# Altium PCB 606-100870-r01.pcbdoc
Units mm, origin at the board's own origin, x right, y up, seen from the top; angles counter-clockwise.
Board outline 62.5 x 28 mm, 2 copper layers (Top Layer, Bottom Layer), stack 1.471 mm thick; 13 components, 5 nets, 34 pads, 13 vias.
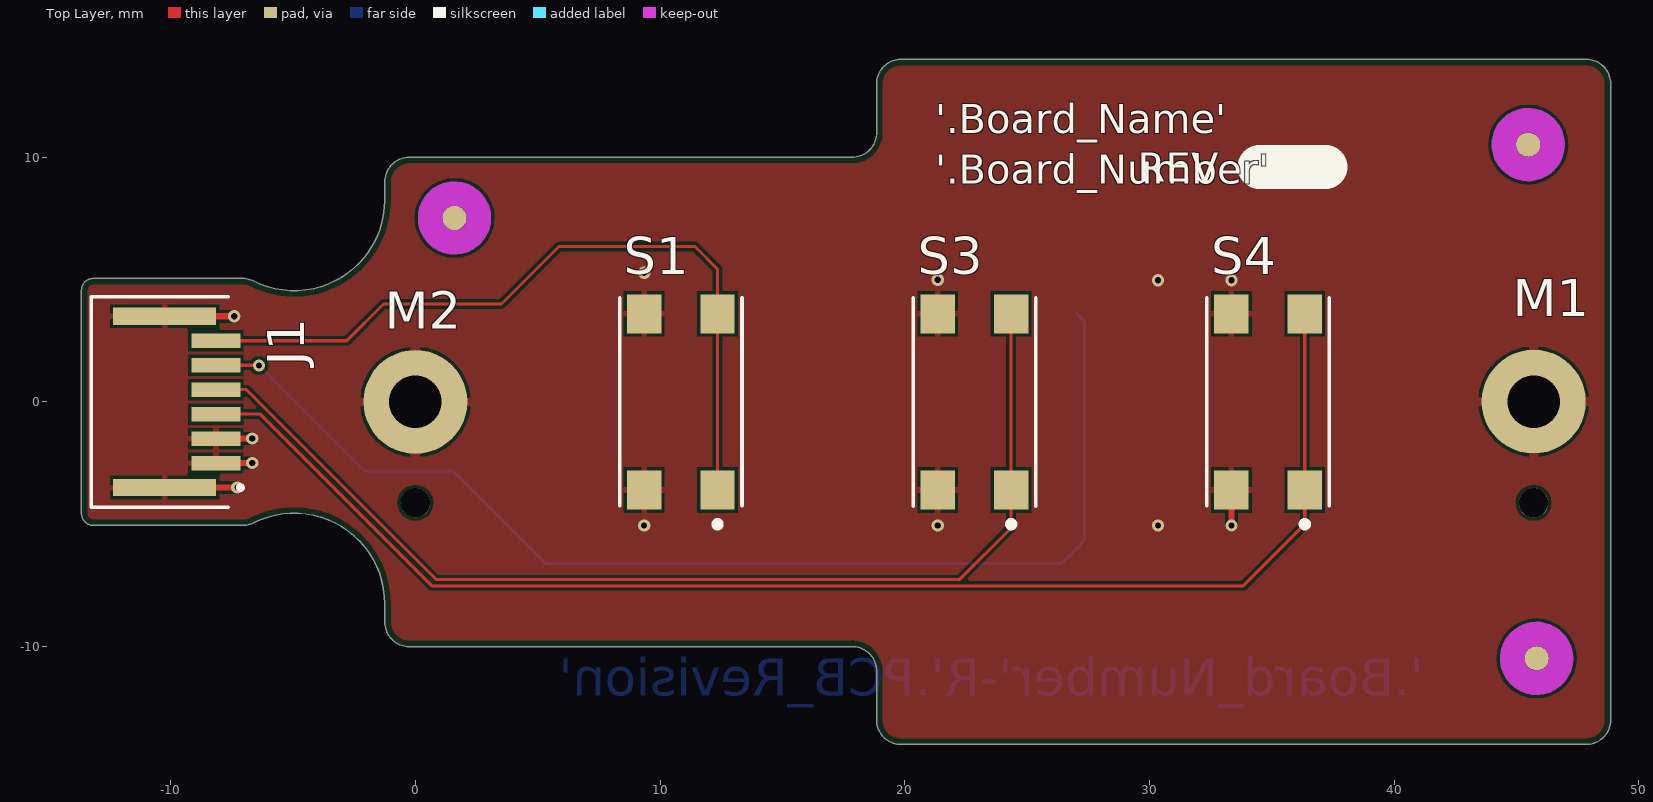
[diagram p0: Top Layer view]
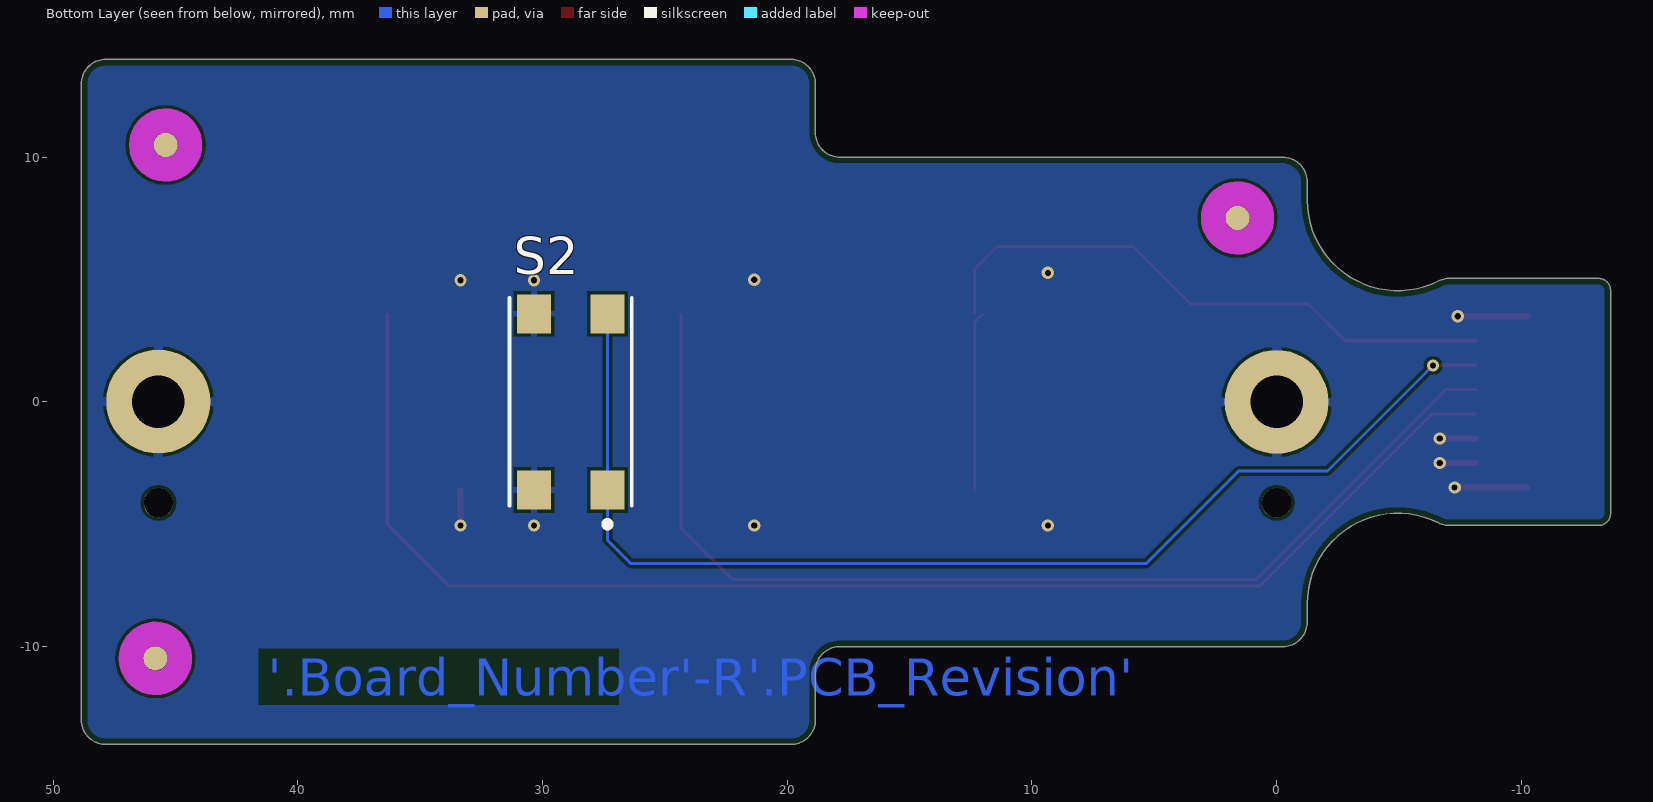
[diagram p1: Bottom Layer view, seen from below]

## Layer stack, top to bottom
Top Solder: solder mask 0.0102, Solder Resist, Dk 3.5
Top Layer: signal copper 0.0356
Dielectric 1: core 1.4, FR-4, Dk 4.2
Bottom Layer: signal copper 0.0356
Bottom Solder: solder mask 0.0102, Solder Resist, Dk 3.5

## Board outline
-13.15,-5.05 -7.06,-5.05 ccw(c-7.06,-4.05) -6.611,-4.944 cw(c-4.95,-8.25) -1.25,-8.25 -1.25,-9 ccw(c-0.25,-9) -0.25,-10 17.85,-10 cw(c17.85,-11) 18.85,-11 18.85,-13 ccw(c19.85,-13) 19.85,-14 47.85,-14 ccw(c47.85,-13) 48.85,-13 48.85,13 ccw(c47.85,13) 47.85,14 19.85,14 ccw(c19.85,13) 18.85,13 18.85,11 cw(c17.85,11) 17.85,10 -0.25,10 ccw(c-0.25,9) -1.25,9 -1.25,8.25 cw(c-4.95,8.25) -6.611,4.944 ccw(c-7.06,4.05) -7.06,5.05 -13.15,5.05 ccw(c-13.15,4.55) -13.65,4.55 -13.65,-4.55 ccw(c-13.15,-4.55)

## Design rules (kind name [scope] priority, off if disabled: settings)
BoardOutlineClearance [All] p1: gap=0.25 except(0: Text-OutlineEdge)
Clearance [All] p1: gap=0.125
ComponentClearance [All] p1: gap=0.18 collisioncheckmode=3 verticalgap=0.18 showdistances=FALSE
HoleSize [All] p1: absolutevalues=TRUE maxlimit=2.7 minlimit=0.025 maxpercent=80.000 minpercent=20.000
MinimumSolderMaskSliver MinimumSolderMaskSliver_1 [isvia vs IsPad] p1: minsoldermaskwidth=0
MinimumSolderMaskSliver [All] p2: minsoldermaskwidth=0.05
PlaneClearance [All] p1: clearance=0.2
PlaneConnect [All] p1: planeconnectstyle=Direct reliefexpansion=0.508 reliefentries=4 reliefconductorwidth=0.254 reliefairgap=0.254
PolygonConnect MTG [InPadClass('Thick_Thermal')] p1: connectstyle=Relief reliefconductorwidth=0.4 reliefentries=4 polygonreliefangle="90 Angle" airgapwidth=0.125
PolygonConnect POLY_VIA [IsVia vs IsPolygon] p2: connectstyle=Direct reliefconductorwidth=0.254 reliefentries=4 polygonreliefangle="90 Angle" airgapwidth=0.254
PolygonConnect PolygonConnect_1 [All] p3: connectstyle=Relief reliefconductorwidth=0.25 reliefentries=4 polygonreliefangle="90 Angle" airgapwidth=0.125
RoomDefinition Handle_Button [InComponentClass('Handle_Button')] p1: confinementstyle=ConfineIn formatcopy=TRUE lockcomponents=FALSE outline -11.985,-14.067 71.531,-14.067 71.531,7.929 -11.985,7.929
RoutingVias [All] p1: holewidth=0.25 width=0.5 viastyle="Through Hole" minholewidth=0.25 minwidth=0.5 maxholewidth=0.25 maxwidth=0.5
SilkToSilkClearance [All] p1 off: silktosilkclearance=0.05
SilkToSolderMaskClearance [IsPad] p1: minsilkscreentomaskgap=0.125 clearancetoexposedcopper=TRUE
SolderMaskExpansion [All] p1: expansion=0.05
Width PWR_GND [InNetClass('PWR_GND')] p1: maxlimit=0.25 minlimit=0.25 preferedwidth=0.25
Width CRITICAL [InNetClass('MOTOR_DRIVERS')] p2: maxlimit=0.4 minlimit=0.3 preferedwidth=0.4
Width [All] p3: maxlimit=0.5 minlimit=0.125 preferedwidth=0.125
23 further rules are at their usual default settings.

## Classes and differential pairs
pad class Thick_Thermal: M1-1 M2-1
component class Handle_Button: J1 M1 M2 S1 S2 S3 S4
net class PWR_GND: GND

## Components (designator, comment, footprint, x,y, rotation, side; value= is the part's Value field where it differs from the comment)
J1 "HFW6R-2STE1LF" CON_FCI_HFW6R -9.15,0 r90 top
M1 "MTGC425H215P" MTGC425H215P 45.7,0 r0 top
M2 "MTGC425H215P" MTGC425H215P -0.007,-0.011 r0 top
S1 "TL3305AF260QG" SW_TL3305_G 10.85,0 r90 top
S2 "TL3305AF260QG" SW_TL3305_G 28.85,0 r90 bottom
S3 "TL3305AF260QG" SW_TL3305_G 22.85,0 r90 top
S4 "TL3305AF260QG" SW_TL3305_G 34.85,0 r90 top
? "Comment" Fiducial_c100opening300 1.599,7.517 r180 bottom
? "Comment" Fiducial_c100opening300 45.825,-10.483 r180 bottom
? "Comment" Fiducial_c100opening300 45.407,10.5 r180 bottom
? "Comment" Fiducial_c100opening300 45.482,10.517 r0 top
? "Comment" Fiducial_c100opening300 45.825,-10.483 r0 top
? "Comment" Fiducial_c100opening300 1.599,7.517 r0 top

## Footprints (in the part's own frame and the unit in brackets; to place one, negate y for a bottom-side part, rotate by r counter-clockwise, add the part's x,y. Pads: shape width x height; smd on the part's side, far side on the other; paste and mask are expansions set on the pad)
CON_FCI_HFW6R [mm] "CON_JST_S3B-ZR-SM4A"
  rect 0.6x2 smd mask+0.05: 1(2.5,-1) 2(1.5,-1) 3(0.5,-1) 4(-0.5,-1) 5(-1.5,-1) 6(-2.5,-1)
  rect 0.7x4.2 smd mask+0.05: 7(3.5,1.1) 8(-3.5,1.1)
  silkscreen extent -4.3,-2.09 4.3,4.1, body extent -4.3,-1.6 4.3,4.1, height 2
Fiducial_c100opening300 [mm]
  round 1 smd paste-10 mask+1: 0(0,0)
  Top Layer keep-out circle w1: c0,0 r1
MTGC425H215P [mm] "MTGC425H215P"
  round 4.25 hole 2.15: 1(0.007,0.011)
SW_TL3305_G [mm] "SWITCH TACTILE SPST-NO 50MA 12V"
  rect 1.6x1.4 smd mask+0.05: 1(-3.6,-1.5) 2(3.6,-1.5) 3(-3.6,1.5) 4(3.6,1.5)
  silkscreen extent -5.12,-2.5 4.25,2.5, body extent -2.25,-2.25 2.25,2.25, height 3.8

## Part data
J1: "CONN FFC FPC TOP 6POS 1.00MM R/A"
M1 M2: "MTG, 4.25mm PAD, 2.15mm Plated Hole"
S1 S2 S3 S4: "SWITCH TACTILE SPST-NO 50MA 12V"

## Free pads (board coordinates)
  round 1.2 hole 1.2 unplated: 0(0,-4.125) 0(45.7,-4.125)

## Via types
v1: diameter 0.5, hole 0.25, Top Layer to Bottom Layer, tented both sides, 13 vias

## Nets (pads, with @x,y where several pads share a name; then routed paths per layer and width w, separated by ;. In a path a pad name is that pad's centre, name@x,y a point inside that pad or via, vN(x,y) a via of type N, cw(c..) or ccw(c..) an arc to the next point about the centre after c; other vN are vias at no path point)
BTN_MENU: J1.1 S1.1 S1.2 | length 31.6
  Top Layer w0.125: J1.1@-8.15,2.5 -2.8,2.5 -1.3,4 3.523,4 5.873,6.35 11.425,6.35 12.35,5.425 S1.2@12.35,3.6 ; S1.2@12,3.6 12.35,3.25 S1.1@12.35,-3.6
BTN_SYS: J1.4 S4.1 S4.2 | length 57
  Top Layer w0.125: J1.4@-8.15,-0.5 -6.341,-0.5 0.675,-7.516 33.834,-7.516 36.35,-5 S4.1@36.35,-3.6 S4.2@36.35,3.6
BTN_TRACK: J1.3 S3.1 S3.2 | length 45.3
  Top Layer w0.125: J1.3@-8.15,0.5 -6.9,0.5 0.866,-7.266 22.234,-7.266 24.35,-5.15 S3.1@24.35,-3.6 S3.2@24.35,3.6
BTN_TRIG: J1.2 S2.1 S2.2 | length 48.6
  Top Layer w0.125: J1.2@-8.15,1.5 -6.4,1.5 v1(-6.388,1.488)
  Bottom Layer w0.125: v1(-6.388,1.488) -2.077,-2.823 1.553,-2.823 5.33,-6.6 26.4,-6.6 27.35,-5.65 S2.1@27.35,-3.6 27.35,3.275 S2.2@27.025,3.6
GND: J1.5 J1.6 J1.7 J1.8 M1.1 M2.1 S1.3 S1.4 S2.3 S2.4 S3.3 S3.4 S4.3 S4.4 | length 10.2
  Top Layer w0.25: J1.8@-10.25,-3.5 v1(-7.275,-3.5) ; J1.7@-10.25,3.5 v1(-7.4,3.5) ; J1.6@-8.142,-2.5 v1(-6.667,-2.5) ; J1.5@-8.142,-1.5 v1(-6.667,-1.5) ; v1(33.35,-5.05) S4.3@33.35,-3.6
  other v1: 9.35,-5.05 21.35,-5.05 30.35,-5.05 21.35,4.993 30.35,4.975 33.35,4.975 9.35,5.275
pads on no net: ?.0

## Polygon pours and split planes (outlines as drawn)
no net on FAB_DWG (solid): 1029 vertices, not listed, extent 270.174,-80.37 411.22,-66.796
no net on FAB_DWG (solid): 89 vertices, not listed, extent 310.393,-70.562 316.813,-66.798
no net on FAB_DWG (solid): 74 vertices, not listed, extent 322.063,-73.533 329.456,-66.798
no net on FAB_DWG (solid): 83 vertices, not listed, extent 335.845,-72.299 340.75,-67.711
no net on FAB_DWG (solid): 82 vertices, not listed, extent 347.458,-70.943 353.803,-67.715
no net on FAB_DWG (solid): -243.368,9 ccw(c-243.868,9) -243.868,9.5 ccw(c-243.868,9) -244.368,9 ccw(c-243.868,9) -243.868,8.5 ccw(c-243.868,9) -243.368,9
no net on FAB_DWG (solid): -243.368,-15 ccw(c-243.868,-15) -243.868,-14.5 ccw(c-243.868,-15) -244.368,-15 ccw(c-243.868,-15) -243.868,-15.5 ccw(c-243.868,-15) -243.368,-15
no net on FAB_DWG (solid): -247.368,9 ccw(c-247.868,9) -247.868,9.5 ccw(c-247.868,9) -248.368,9 ccw(c-247.868,9) -247.868,8.5 ccw(c-247.868,9) -247.368,9
no net on FAB_DWG (solid): -249.368,9 ccw(c-249.868,9) -249.868,9.5 ccw(c-249.868,9) -250.368,9 ccw(c-249.868,9) -249.868,8.5 ccw(c-249.868,9) -249.368,9
no net on FAB_DWG (solid): -251.368,9 ccw(c-251.868,9) -251.868,9.5 ccw(c-251.868,9) -252.368,9 ccw(c-251.868,9) -251.868,8.5 ccw(c-251.868,9) -251.368,9
no net on FAB_DWG (solid): -245.368,9 ccw(c-245.868,9) -245.868,9.5 ccw(c-245.868,9) -246.368,9 ccw(c-245.868,9) -245.868,8.5 ccw(c-245.868,9) -245.368,9
no net on FAB_DWG (solid): -247.368,-15 ccw(c-247.868,-15) -247.868,-14.5 ccw(c-247.868,-15) -248.368,-15 ccw(c-247.868,-15) -247.868,-15.5 ccw(c-247.868,-15) -247.368,-15
no net on FAB_DWG (solid): -249.368,-15 ccw(c-249.868,-15) -249.868,-14.5 ccw(c-249.868,-15) -250.368,-15 ccw(c-249.868,-15) -249.868,-15.5 ccw(c-249.868,-15) -249.368,-15
no net on FAB_DWG (solid): -251.368,-15 ccw(c-251.868,-15) -251.868,-14.5 ccw(c-251.868,-15) -252.368,-15 ccw(c-251.868,-15) -251.868,-15.5 ccw(c-251.868,-15) -251.368,-15
no net on FAB_DWG (solid): -245.368,-15 ccw(c-245.868,-15) -245.868,-14.5 ccw(c-245.868,-15) -246.368,-15 ccw(c-245.868,-15) -245.868,-15.5 ccw(c-245.868,-15) -245.368,-15
no net on FAB_DWG (solid): -255.368,9 ccw(c-255.868,9) -255.868,9.5 ccw(c-255.868,9) -256.368,9 ccw(c-255.868,9) -255.868,8.5 ccw(c-255.868,9) -255.368,9
no net on FAB_DWG (solid): -253.368,9 ccw(c-253.868,9) -253.868,9.5 ccw(c-253.868,9) -254.368,9 ccw(c-253.868,9) -253.868,8.5 ccw(c-253.868,9) -253.368,9
no net on FAB_DWG (solid): -259.368,9 ccw(c-259.868,9) -259.868,9.5 ccw(c-259.868,9) -260.368,9 ccw(c-259.868,9) -259.868,8.5 ccw(c-259.868,9) -259.368,9
no net on FAB_DWG (solid): -257.368,9 ccw(c-257.868,9) -257.868,9.5 ccw(c-257.868,9) -258.368,9 ccw(c-257.868,9) -257.868,8.5 ccw(c-257.868,9) -257.368,9
no net on FAB_DWG (solid): -255.368,-15 ccw(c-255.868,-15) -255.868,-14.5 ccw(c-255.868,-15) -256.368,-15 ccw(c-255.868,-15) -255.868,-15.5 ccw(c-255.868,-15) -255.368,-15
no net on FAB_DWG (solid): -253.368,-15 ccw(c-253.868,-15) -253.868,-14.5 ccw(c-253.868,-15) -254.368,-15 ccw(c-253.868,-15) -253.868,-15.5 ccw(c-253.868,-15) -253.368,-15
no net on FAB_DWG (solid): -257.368,-15 ccw(c-257.868,-15) -257.868,-14.5 ccw(c-257.868,-15) -258.368,-15 ccw(c-257.868,-15) -257.868,-15.5 ccw(c-257.868,-15) -257.368,-15
no net on FAB_DWG (solid): -259.368,-15 ccw(c-259.868,-15) -259.868,-14.5 ccw(c-259.868,-15) -260.368,-15 ccw(c-259.868,-15) -259.868,-15.5 ccw(c-259.868,-15) -259.368,-15
no net on FAB_DWG (solid): -261.368,9 ccw(c-261.868,9) -261.868,9.5 ccw(c-261.868,9) -262.368,9 ccw(c-261.868,9) -261.868,8.5 ccw(c-261.868,9) -261.368,9
no net on FAB_DWG (solid): -263.368,9 ccw(c-263.868,9) -263.868,9.5 ccw(c-263.868,9) -264.368,9 ccw(c-263.868,9) -263.868,8.5 ccw(c-263.868,9) -263.368,9
no net on FAB_DWG (solid): -267.368,9 ccw(c-267.868,9) -267.868,9.5 ccw(c-267.868,9) -268.368,9 ccw(c-267.868,9) -267.868,8.5 ccw(c-267.868,9) -267.368,9
no net on FAB_DWG (solid): -265.368,9 ccw(c-265.868,9) -265.868,9.5 ccw(c-265.868,9) -266.368,9 ccw(c-265.868,9) -265.868,8.5 ccw(c-265.868,9) -265.368,9
no net on FAB_DWG (solid): -261.368,-15 ccw(c-261.868,-15) -261.868,-14.5 ccw(c-261.868,-15) -262.368,-15 ccw(c-261.868,-15) -261.868,-15.5 ccw(c-261.868,-15) -261.368,-15
no net on FAB_DWG (solid): -263.368,-15 ccw(c-263.868,-15) -263.868,-14.5 ccw(c-263.868,-15) -264.368,-15 ccw(c-263.868,-15) -263.868,-15.5 ccw(c-263.868,-15) -263.368,-15
no net on FAB_DWG (solid): -265.368,-15 ccw(c-265.868,-15) -265.868,-14.5 ccw(c-265.868,-15) -266.368,-15 ccw(c-265.868,-15) -265.868,-15.5 ccw(c-265.868,-15) -265.368,-15
no net on FAB_DWG (solid): -267.368,-15 ccw(c-267.868,-15) -267.868,-14.5 ccw(c-267.868,-15) -268.368,-15 ccw(c-267.868,-15) -267.868,-15.5 ccw(c-267.868,-15) -267.368,-15
no net on FAB_DWG (solid): -269.368,9 ccw(c-269.868,9) -269.868,9.5 ccw(c-269.868,9) -270.368,9 ccw(c-269.868,9) -269.868,8.5 ccw(c-269.868,9) -269.368,9
no net on FAB_DWG (solid): -271.368,9 ccw(c-271.868,9) -271.868,9.5 ccw(c-271.868,9) -272.368,9 ccw(c-271.868,9) -271.868,8.5 ccw(c-271.868,9) -271.368,9
no net on FAB_DWG (solid): -273.968,0.5 -273.468,2 -242.268,2 -241.768,0.5 -273.968,0.5
no net on FAB_DWG (solid): -241.768,-6.5 -242.268,-8 -273.468,-8 -273.968,-6.5 -241.768,-6.5
no net on FAB_DWG (solid): -269.368,-15 ccw(c-269.868,-15) -269.868,-14.5 ccw(c-269.868,-15) -270.368,-15 ccw(c-269.868,-15) -269.868,-15.5 ccw(c-269.868,-15) -269.368,-15
no net on FAB_DWG (solid): -271.368,-15 ccw(c-271.868,-15) -271.868,-14.5 ccw(c-271.868,-15) -272.368,-15 ccw(c-271.868,-15) -271.868,-15.5 ccw(c-271.868,-15) -271.368,-15
no net on FAB_DWG (solid): -328.868,8.5 -329.868,12.5 -328.868,12 -327.868,12.5 -328.868,8.5
no net on FAB_DWG (solid): -328.868,-15.5 -327.868,-19.5 -328.868,-19 -329.868,-19.5 -328.868,-15.5
no net on ASY_DWG (solid): 1029 vertices, not listed, extent 270.174,-80.37 411.22,-66.796
no net on ASY_DWG (solid): 89 vertices, not listed, extent 310.393,-70.562 316.813,-66.798
no net on ASY_DWG (solid): 74 vertices, not listed, extent 322.063,-73.533 329.456,-66.798
no net on ASY_DWG (solid): 83 vertices, not listed, extent 335.845,-72.299 340.75,-67.711
no net on ASY_DWG (solid): 82 vertices, not listed, extent 347.458,-70.943 353.803,-67.715
no net on ASY_DWG_R (solid): 1029 vertices, not listed, extent -359.78,-80.37 -218.734,-66.796
no net on ASY_DWG_R (solid): 89 vertices, not listed, extent -265.373,-70.562 -258.954,-66.798
no net on ASY_DWG_R (solid): 74 vertices, not listed, extent -278.016,-73.533 -270.624,-66.798
no net on ASY_DWG_R (solid): 83 vertices, not listed, extent -289.311,-72.299 -284.406,-67.711
no net on ASY_DWG_R (solid): 82 vertices, not listed, extent -302.363,-70.943 -296.018,-67.715
no net on TITLEBLOCK (solid): 331 vertices, not listed, extent -37.805,-53.37 20.9,-46.75
no net on TITLEBLOCK (solid): -15.868,-46.97 -13.33,-49.288 -13.33,-46.97 -15.868,-46.97
no net on TITLEBLOCK (solid): -21.055,-46.97 -19.932,-48.179 -18.853,-46.97 -21.055,-46.97
no net on TITLEBLOCK (solid): -10.57,-48.87 -9.58,-47.07 -8.68,-48.87 -10.57,-48.87
no net on TITLEBLOCK (solid): 26 vertices, not listed, extent -5.73,-48.27 -3.03,-46.97
GND on Bottom Layer "GND_L02_P000" (solid, pour order 0): 19 vertices, not listed, extent -15,-19 51,18
GND on Top Layer "GND_L01_P002" (solid, pour order 2): -15.7,13.8 -15.7,-12.275 15.39,-12.275 18.665,-15.55 18.74,-15.625 50.55,-15.625 50.55,16.35 50.725,16.525 16.75,16.525 14.375,16.525 11.65,13.8

## Other copper
Top Layer:
  text ".Layer_Name" at -9.203,-72 h3.5
Bottom Layer:
  text "'.Board_Number'-R'.PCB_Revision'" at 41.229,-12 h1.52
  text ".Layer_Name" at -13.694,-72 h3.5

## Silkscreen, mask and mechanical layers (free items; w line width, h text height)
Top Overlay:
  lines w1.8: 34.5,9.61 37.2,9.61
  text "'.Board_Name'" at 21.252,10.987 h1.2
  text "REV" at 29.525,9 h1.2
  text "'.Board_Number'" at 21.252,8.916 h1.2
  text ".Layer_Name" at -10.044,-71.917 h3.5
Bottom Overlay:
  text ".Layer_Name" at -14.969,-71.842 h3.5
Top Paste:
  text ".Layer_Name" at -9.919,-72.617 h3.5
Bottom Paste:
  text ".Layer_Name" at -13.844,-72.583 h3.5
Top Solder:
  text ".Layer_Name" at -10.028,-72 h3.5
Bottom Solder:
  text ".Layer_Name" at -13.469,-72.117 h3.5
Drill Guide:
  text ".Layer_Name" at 12.431,-27.167 h3.81
Outline:
  lines w0.013: -13.65,-4.55 ccw(c-13.15,-4.55) -13.15,-5.05 ; -13.65,-4.55 ccw(c-13.15,-4.55) -13.15,-5.05 ; -13.65,-4.55 -13.65,-4.3 -13.65,4.3 -13.65,4.55 ; -13.65,-4.55 -13.65,4.55 ; -13.65,4.55 cw(c-13.15,4.55) -13.15,5.05 ; -13.65,4.55 cw(c-13.15,4.55) -13.15,5.05 ; -13.15,-5.05 -7.06,-5.05 ; -13.15,-5.05 -7.06,-5.05 ; -13.15,5.05 -7.06,5.05 ; -13.15,5.05 -7.06,5.05 ; -7.06,-5.05 ccw(c-7.06,-4.05) -6.611,-4.944 ; -7.06,-5.05 ccw(c-7.06,-4.05) -6.611,-4.944 ; -7.06,5.05 cw(c-7.06,4.05) -6.611,4.944 ; -7.06,5.05 cw(c-7.06,4.05) -6.611,4.944 ; -6.611,-4.944 cw(c-4.95,-8.25) -1.25,-8.25 ; -6.611,-4.944 cw(c-4.95,-8.25) -1.25,-8.25 ; -6.611,4.944 ccw(c-4.95,8.25) -1.25,8.25 ; -6.611,4.944 ccw(c-4.95,8.25) -1.25,8.25 ; -1.25,-9 ccw(c-0.25,-9) -0.25,-10 ; -1.25,-9 ccw(c-0.25,-9) -0.25,-10 ; -1.25,-9 -1.25,-8.25 ; -1.25,-9 -1.25,-8.25 ; -1.25,8.25 -1.25,9 ; -1.25,8.25 -1.25,9 ; -1.25,9 cw(c-0.25,9) -0.25,10 ; -1.25,9 cw(c-0.25,9) -0.25,10 ; -0.25,-10 17.85,-10 ; -0.25,-10 17.85,-10 ; -0.25,10 17.85,10 ; -0.25,10 17.85,10 ; 17.85,-10 cw(c17.85,-11) 18.85,-11 ; 17.85,-10 cw(c17.85,-11) 18.85,-11 ; 17.85,10 ccw(c17.85,11) 18.85,11 ; 17.85,10 ccw(c17.85,11) 18.85,11 ; 18.85,-13 ccw(c19.85,-13) 19.85,-14 ; 18.85,-13 ccw(c19.85,-13) 19.85,-14 ; 18.85,-13 18.85,-11 ; 18.85,-13 18.85,-11 ; 18.85,11 18.85,13 ; 18.85,11 18.85,13 ; 18.85,13 cw(c19.85,13) 19.85,14 ; 18.85,13 cw(c19.85,13) 19.85,14 ; 19.85,-14 47.85,-14 ; 19.85,-14 47.85,-14 ; 19.85,14 47.85,14 ; 19.85,14 47.85,14 ; 47.85,-14 ccw(c47.85,-13) 48.85,-13 ; 47.85,-14 ccw(c47.85,-13) 48.85,-13 ; 47.85,14 cw(c47.85,13) 48.85,13 ; 47.85,14 cw(c47.85,13) 48.85,13 ; 48.85,-13 48.85,13 ; 48.85,-13 48.85,13
FAB_DWG:
  drawing of 161 lines, arcs and shapes, not listed
  text "1" at 354.056,377.618 h7.62
  text "6" at -197.276,377.44 h7.62
  text "5" at -86.684,377.364 h7.62
  text "7" at -307.207,377.313 h7.62
  text "4" at 22.917,377.212 h7.62
  text "3" at 133.686,377.212 h7.62
  text "2" at 243.719,377.212 h7.62
  text "REVISIONS" at 308.076,368.63 h2.54
  text "REV" at 225.784,361.63 h2.03
  text "DESCRIPTION" at 280.288,361.63 h2.03
  text "DATE" at 371.972,361.63 h2.03
  text "APRVD" at 397.16,361.63 h2.03
  text "NOTES: UNLESS OTHERWISE SPECIFIED" at -330.127,355.815 h2.03
  text "01" at 226.188,353.63 h2.54
  text "INITIAL RELEASE" at 237.22,353.63 h2.54
  text "07/21/2016" at 366.06,353.63 h2.54
  text "1   DIMENSIONS AND VALUES ARE METRIC." at -333.877,347.815 h2.03
  text "2   FABRICATION OF PRINTED CIRCUIT BOARD SHALL BE IN ACCORDANCE WITH" at -333.877,341.815 h2.03
  text "IPC-6011 AND IPC-6012, CLASS 2, AND THE DESIGN INTENT OF IPC-2221 AND" at -333.877,337.815 h2.03
  text "IPC-2222,CLASS 2, AND SHALL MEET THE ACCEPTABILITY REQUIREMENTS OF" at -333.877,333.815 h2.03
  text "IPC-A-600. PRODUCE PCB USING GERBER OR ODB++ FILES PROVIDED." at -333.877,329.815 h2.03
  text "3   FABRICATION VENDOR MUST BE UL APPROVED AND BOARD SHALL BE MARKED WITH" at -333.877,323.815 h2.03
  text "A UL REGISTERED LOGO. MATERIAL MUST MEET UL 94V-0 FLAMMABILITY RATING." at -333.877,319.815 h2.03
  text "4   MATERIAL REQUIREMENTS: MANUFACTURER SHALL SELECT MATERIALS TO ACHIEVE A" at -333.877,313.815 h2.03
  text "BALANCED CONSTRUCTION WITH THE OPTION OF MODIFYING DIELECTRIC THICKNESS" at -333.877,309.815 h2.03
  text "D" at 415.905,307.946 h7.62
  text "D" at -368.777,307.794 h7.62
  text "TO MEET THE REQUIREMENTS SPECIFIED HEREIN." at -333.877,305.815 h2.03
  text "5   BASE MATERIALS: GLASS EPOXY FR4 OR EQUIVALENT PER IPC-4101 MEETING RoHS" at -333.877,299.815 h2.03
  text "REQUIREMENTS FOR PCB FABRICATION AND ASSEMBLY, NOT LESS THAN TG150," at -333.877,295.815 h2.03
  text "A  SEE LAYER DETAIL FOR LAYER STACK UP, ESTIMATED DIELECTRIC THICKNESS," at -333.877,291.815 h2.03
  text "AND COPPER WEIGHT." at -333.877,287.815 h2.03
  text "B  MANUFACTURER SHALL SUBMIT A PROPOSED STACK UP FOR SYNAPSE APPROVAL" at -333.877,283.815 h2.03
  text "IF MODIFICATION IS REQUIRED." at -333.877,279.815 h2.03
  text "C  NO MATERIAL SUBSTITUTIONS WILL BE ALLOWED WITHOUT SYNAPSE APPROVAL." at -333.877,275.815 h2.03
  text "6   PROCESSING ALLOWANCE:" at -333.877,269.815 h2.03
  text "A  LAYER REGISTRATION FROM PRIMARY SIDE TO SECONDARY SIDE SHALL NOT" at -333.877,265.815 h2.03
  text "EXCEED 0.13mm TOTAL." at -333.877,261.815 h2.03
  text "B  MAXIMUM BOW AND TWIST SHALL BE .75% PER IPC-TM-650." at -333.877,257.815 h2.03
  text "7   VIAS" at -333.877,251.815 h2.03
  text "A  VIAS WITH A FINISHED HOLE SIZE OF 0.25mm OR SMALLER DO NOT REQUIRE" at -333.877,247.815 h2.03
  text "A MINIMUM HOLE SIZE AND MAY BE PLATED SHUT OR FILLED WITH SOLDER" at -333.877,243.815 h2.03
  text "MASK. MINIMUM SOLDER PLATING MUST BE MAINTAINED." at -333.877,239.815 h2.03
  text "B  ALL 0.2MM VIA-IN-PADS TO BE FILLED WITH NON-CONDUCTIVE EXPOXY AND COPLANAR." at -333.877,235.815 h2.03
  text "8   CONDUCTORS:  COPPER FOIL SHALL BE IN ACCORDANCE WITH IPC-4562/0." at -333.877,229.815 h2.03
  text "A  FINISH. COPPER PLATE THICKNESS ON SURFACE COPPER AND PLATED" at -333.877,225.815 h2.03
  text "THROUGH HOLES TO BE 0.025mm MINIMUM." at -333.877,221.815 h2.03
  text "B  MINIMUM FINISH CONDUCTOR WIDTH IS 0.076mm" at -333.877,217.815 h2.03
  text "C  MINIMUM FINISHED CONDUCTOR SPACING (AIR GAP) INCLUDING PADS, VIAS," at -333.877,213.815 h2.03
  text "SHAPES, ETC. IS 0.076mm." at -333.877,209.815 h2.03
  text "9   FINAL FINISH SHALL BE ELECTROLESS NICKEL / IMMERSION GOLD (ENIG)." at -333.877,203.815 h2.03
  text "FINISH THICKNESS SHALL BE 3 TO 6 um [118 TO 236 MICROINCHES] OF NICKEL" at -333.877,199.815 h2.03
  text "AND 0.04 TO 0.125um [1.5 TO 5 MICROINCHES] OF GOLD." at -333.877,195.815 h2.03
  text "FINISH SHALL BE RoHS COMPLIANT AND MEET REQUIREMENTS OF IPC-4552." at -333.877,191.815 h2.03
  text "10  FILLETING IS NOT PERMITTED WITHOUT PRIOR SYNAPSE APPROVAL." at -333.877,185.815 h2.03
  text "C" at 415.905,182.495 h7.62
  text "C" at -368.904,182.292 h7.62
  text "11  SOLDER MASK AND COATING:  APPLY SOLDER MASK TO PRIMARY AND SECONDARY" at -333.877,179.815 h2.03
  text "SIDES OF PRINTED WIRING BOARD USING SUPPLIED GERBER FILES IN ACCORDANCE" at -333.877,175.815 h2.03
  text "WITH IPC-SM-840, THICKNESS BETWEEN 0.02 - 0.04mm, COLOR BLACK MATTE," at -333.877,171.815 h2.03
  text "CLASS 2." at -333.877,167.815 h2.03
  text "12  OVERALL BOARD THICKNESS SHALL BE MEASURED OVER FINAL FINISH INCLUDING" at -333.877,161.815 h2.03
  text "SOLDER MASK." at -333.877,157.815 h2.03
  text "13  SILKSCREEN:  APPLY SILKSCREEN (LEGEND) TO PRIMARY AND SECONDARY SIDES" at -333.877,151.815 h2.03
  text "OF PRINTED CIRCUIT BOARD. USE PERMANENT INK, NON-NUTRIENT, NON-" at -333.877,147.815 h2.03
  text "CONDUCTIVE POLYMER, COLOR WHITE, PER IPC-4781, TYPE 2. RELIEVE LEGEND" at -333.877,143.815 h2.03
  text "FROM ALL EXPOSED LANDS AND HOLES AS REQUIRED." at -333.877,139.815 h2.03
  text "14  ANY ALTERATIONS TO THE PROVIDED GERBER ARTWORK FILES MUST BE SUBMITTED" at -333.877,133.815 h2.03
  text "TO SYNAPSE FOR APPROVAL." at -333.877,129.815 h2.03
  text "15  IMPEDANCE REQUIREMENTS: LAYERS AND SIGNALS WITH CONTROLLED IMPEDANCES" at -334.019,124.133 h2.03
  text "ARE DETAILED IN THE CONTROLLED IMPEDANCE CHART. MANUFACTURER HAS THE" at -333.877,119.815 h2.03
  text "OPTION OF ADJUSTING THE DIELECTRIC THICKNESS AND TRACE WIDTHS AS" at -333.877,115.565 h2.03
  text "REQUIRED TO MEET THE SPECIFICATIONS CONTAINED IN THIS DRAWING." at -333.877,111.565 h2.03
  text "A  IMPEDANCE TOLERANCES ARE +/-10%." at -333.877,106.565 h2.03
  text "B  ANY ADJUSTMENTS TO DIELECTRIC THICKNESS OR TRACE WIDTHS MUST BE" at -333.877,101.815 h2.03
  text "APPROVED BY SYNAPSE." at -333.877,98.065 h2.03
  text "C  IMPEDANCE TEST RESULTS AND TEST COUPONS FROM EACH LOT SHALL BE" at -333.877,93.565 h2.03
  text "PROVIDED TO SYNAPSE." at -333.877,89.758 h2.03
  text "16  MARK MANUFACTURER NAME, INITIALS, OR LOGO, LOT NUMBER, DATE CODE," at -333.877,84.315 h2.03
  text "UL RECOGNITION MARK AND FLAME RATING IN ETCH OR SILKSCREEN." at -333.877,80.315 h2.03
  text "17  PANELIZATION: COORDINATE WITH SYNAPSE OR THE SYNAPSE SPECIFIED" at -333.877,74.565 h2.03
  text "ASSEMBLY VENDOR FOR PANEL SIZE AND CONFIGURATION. IF BOARDS ARE" at -333.877,70.565 h2.03
  text "NOT TO BE COMPLETELY ROUTED OUT, TRIM PANELIZATION TABS TO LESS" at -333.877,66.565 h2.03
  text "THAN 0.1mm UPON DE-PANELIZATION. AVOID PANELIZATION TABS IN AREAS" at -333.877,62.565 h2.03
  text "INDICATED ON THIS DRAWING." at -333.877,58.565 h2.03
  text "B" at -368.675,56.892 h7.62
  text "B" at 416.032,56.892 h7.62
  text "18  BOARD MUST BE ELECTRICALLY TESTED USING SUPPLIED IPC-356 NETLIST." at -333.877,53.565 h2.03
  text "PRIMARY SIDE" at -268.86,18 h2.29
  text "SILKSCREEN" at -238.368,13 h2.29
  text "SOLDERMASK" at -238.368,7.5 h2.29
  text "1.50 +/-0.15" at -339.86,1 h2.29
  text "1 OZ CU" at -290.192,0.5 h2.29
  text "LAYER 1" at -238.368,0 h2.29
  text "FINISHED" at -336.196,-4 h2.29
  text "DIELECTRIC" at -295.688,-4 h2.29
  text "1 OZ CU" at -290.192,-8.5 h2.29
  text "LAYER 2" at -238.368,-8.5 h2.29
  text "THICKNESS" at -337.612,-9 h2.29
  text "SOLDERMASK" at -238.368,-16 h2.29
  text "SILKSCREEN" at -238.368,-22 h2.29
  text "SECONDARY SIDE" at -270.692,-26.5 h2.29
  text "DIMENSIONS ARE FOR REFERENCE ONLY," at -7.85,-36 h2.29
  text "LAYER DETAIL" at -282.252,-39.495 h5.08
  text "USE BOARD OUTLINE FOR DIMENSIONAL DATA." at -12.44,-40.79 h2.29
  text "SCALE:NONE" at -268.528,-46.5 h2.29
  text "A" at 415.778,-68.863 h7.62
  text "A" at -368.929,-68.99 h7.62
  text "APPROVALS" at 207.912,-72.37 h2.03
  text "DATE" at 250.972,-72.37 h2.03
  text "UNLESS OTHERWISE" at 151.964,-74.37 h2.54
  text "DESIGNER" at 191.22,-78.37 h2.03
  text "SPECIFIED" at 159.076,-79.37 h2.54
  text "DIMENSIONS ARE" at 153.996,-84.37 h2.54
  text "F. PRICE" at 195.22,-84.37 h2.54
  text "07/21/2016" at 245.06,-84.37 h2.54
  text "1511 Sixth Ave. Suite 300, Seattle, WA 98101 206.381.0898" at 282.308,-85.37 h2.54
  text "IN MILLIMETERS" at 153.996,-89.37 h2.54
  text "ENGINEER" at 191.22,-91.37 h2.03
  text "PRINTED CIRCUIT BOARD" at 308.716,-93.87 h3.81
  text "PROPRIETARY" at 103.456,-94.37 h3.81
  text "D. BRUEY" at 195.22,-97.37 h2.54
  text "TOLERANCES:" at 158.044,-99.37 h2.54
  text "AND" at 115.648,-100.37 h3.81
  text ".Board_Name" at 302.656,-102.117 h5.08
  text "MECH ENG" at 191.22,-104.37 h2.03
  text ".XX" at 156.724,-106.37 h2.29
  text "0.25" at 170.22,-106.37 h2.29
  text "CONFIDENTIAL" at 101.932,-106.87 h3.81
  text "SIZE" at 274.372,-108.37 h1.78
  text "DWG NO" at 285.22,-108.37 h1.78
  text "REV" at 393.084,-108.37 h1.78
  text "A. DAHLGREN" at 195.22,-110.37 h2.54
  text "THE INFORMATION CONTAINED IN" at 103.946,-111.12 h1.52
  text ".XXX" at 154.892,-113.37 h2.29
  text "0.127" at 170.22,-113.37 h2.29
  text "THIS DRAWING IS PROPRIETARY AND" at 102.122,-113.87 h1.52
  text "RESTRICTED. ANY REPRODUCTION" at 103.946,-116.62 h1.52
  text "601-" at 302.275,-118.071 h7.62
  text ".Board_Number" at 330.675,-118.171 h7.62
  text "D" at 274.172,-118.37 h7.62
  text ".PCB_Revision" at 388.616,-118.878 h7.62
  text "IN PART OR WHOLE WITHOUT THE" at 103.946,-119.37 h1.52
  text "ANGLES" at 157.228,-120.37 h2.29
  text "5" at 176.22,-120.37 h2.29
  text "EXPRESS WRITTEN PERMISSION" at 104.912,-122.12 h1.52
  text "OF THE OWNER IS PROHIBITED" at 104.912,-124.87 h1.52
  text "SCALE:NONE" at 275.1,-125.37 h1.78
  text "SHEET 1 OF 1" at 386.676,-125.37 h1.78
  text "1" at 354.26,-137.418 h7.62
  text "6" at -197.2,-137.57 h7.62
  text "5" at -86.761,-137.57 h7.62
  text "4" at 22.688,-137.849 h7.62
  text "3" at 133.508,-137.875 h7.62
  text "2" at 243.947,-137.875 h7.62
  text "7" at -307.309,-138.434 h7.62
ASY_DWG:
  circle w0.38: c179.963,-117.822 r0.829
  lines w0.3: 190.22,-127.37 190.22,-67.37 ; 190.22,-113.37 270.22,-113.37 ; 190.22,-100.37 270.22,-100.37 ; 190.22,-87.37 270.22,-87.37 411.22,-87.37 ; 190.22,-74.37 270.22,-74.37 ; 221.22,344.63 411.22,344.63 ; 221.545,351.722 221.22,351.63 411.22,351.63 ; 221.545,366.722 221.22,366.63 411.22,366.63 ; 235.22,337.63 235.22,366.63 ; 240.22,-127.37 240.22,-67.37 ; 270.22,-127.37 270.22,-67.37 ; 270.22,-121.37 411.22,-121.37 ; 270.22,-105.37 410.22,-105.37 ; 283.22,-121.37 283.22,-105.37 ; 360.22,337.63 360.22,366.63 ; 379.22,-121.37 379.22,-105.37 ; 391.22,337.63 391.22,366.63
  lines w0.38: 165.22,-113.37 167.22,-113.37 ; 165.22,-111.37 167.22,-111.37 ; 165.22,-106.37 167.22,-106.37 ; 165.22,-104.37 167.22,-104.37 ; 166.22,-112.37 166.22,-110.37 ; 166.22,-105.37 166.22,-103.37 ; 171.22,-120.37 173.22,-120.37 ; 171.22,-118.37 173.22,-118.37 ; 172.22,-119.37 172.22,-117.37
  lines w0.508: 191.242,373.834 191.242,386.788 ; 191.242,373.834 191.242,386.788 ; 191.242,373.834 191.242,386.788 ; -379.369,-2.721 -360.065,-2.721 -379.369,-2.721 ; -379.369,-2.264 -360.065,-2.264 -379.369,-2.264 ; -379.369,122.678 -360.065,122.678 -379.369,122.678 ; -379.369,123.136 -360.065,123.136 -379.369,123.136 ; -379.369,248.078 -360.065,248.078 -379.369,248.078 ; -379.369,248.535 -360.065,248.535 -379.369,248.535 ; -250.133,-140.821 -250.133,-127.867 -250.133,-140.821 ; -250.133,373.834 -250.133,386.788 -250.133,373.834 ; -249.676,-140.821 -249.676,-127.867 -249.676,-140.821 ; -249.676,373.834 -249.676,386.788 -249.676,373.834 ; -139.923,-140.821 -139.923,-127.867 -139.923,-140.821 ; -139.923,373.834 -139.923,386.788 -139.923,373.834 ; -139.466,-140.821 -139.466,-127.867 -139.466,-140.821 ; -139.466,373.834 -139.466,386.788 -139.466,373.834 ; -29.687,-140.821 -29.687,-127.867 -29.687,-140.821 ; -29.687,373.834 -29.687,386.788 -29.687,373.834 ; -29.23,-140.821 -29.23,-127.867 -29.23,-140.821 ; -29.23,373.834 -29.23,386.788 -29.23,373.834 ; 80.575,373.834 80.575,386.788 80.575,373.834 ; 81.032,373.834 81.032,386.788 81.032,373.834 ; 190.785,373.834 190.785,386.788 190.785,373.834 ; 300.996,374.088 300.996,386.788 300.996,374.088 ; 301.021,-140.821 301.021,-127.867 301.021,-140.821 ; 301.453,373.834 301.453,386.788 301.453,373.834 ; 301.478,-140.821 301.478,-127.867 301.478,-140.821 ; 411.46,-2.721 430.764,-2.721 411.46,-2.721 ; 411.46,-2.264 430.764,-2.264 411.46,-2.264 ; 411.46,122.704 430.764,122.704 411.46,122.704 ; 411.46,123.161 430.764,123.161 411.46,123.161 ; 411.46,248.129 430.764,248.129 411.46,248.129 ; 411.46,248.586 430.764,248.586 411.46,248.586
  lines w1: -359.78,-127.37 411.22,-127.37 411.22,373.63 -359.78,373.63 -359.78,-127.37
  lines w1.1: 81.22,-140.37 81.22,-127.37 ; 95.22,-127.37 95.22,-87.37 146.22,-87.37 ; 146.22,-127.37 146.22,-87.37 ; 190.22,-140.37 190.22,-127.37 ; 221.22,337.63 221.22,373.63 ; 221.22,358.63 411.22,358.63 ; 270.22,-67.37 146.22,-67.37 146.22,-87.37
  text "1" at 354.056,377.618 h7.62
  text "6" at -197.276,377.44 h7.62
  text "5" at -86.684,377.364 h7.62
  text "7" at -307.207,377.313 h7.62
  text "4" at 22.917,377.212 h7.62
  text "3" at 133.686,377.212 h7.62
  text "2" at 243.719,377.212 h7.62
  text "REVISIONS" at 308.076,368.63 h2.54
  text "REV" at 225.784,361.63 h2.03
  text "DESCRIPTION" at 280.288,361.63 h2.03
  text "DATE" at 371.972,361.63 h2.03
  text "APRVD" at 397.16,361.63 h2.03
  text "NOTES: UNLESS OTHERWISE SPECIFIED" at -347.655,361.53 h2.03
  text "1   RoHS COMPLIANT ASSEMBLY REQUIRED. ASSEMBLE PER IPC-A-610, CLASS 2," at -347.555,355.03 h2.03
  text "01" at 226.188,353.63 h2.54
  text "INITIAL RELEASE" at 237.22,353.63 h2.54
  text "07/21/2016" at 366.06,353.63 h2.54
  text "2   AQUEOUS BASED CLEANING AFTER SOLDER FOR ALL COMPONENTS IS PREFERRED, NO-CLEAN" at -347.461,349.825 h2.03
  text "RoHS SOLDER PROCESS IS ACCEPTABLE." at -347.605,345.68 h2.03
  text "3   ITEM IDENTIFICATION: MARK REVISION NUMBER OF THIS DRAWING IN THE SPACE PROVIDED." at -347.78,339.88 h2.03
  text "D" at 415.905,307.946 h7.62
  text "D" at -368.777,307.794 h7.62
  text "C" at 415.905,182.495 h7.62
  text "C" at -368.904,182.292 h7.62
  text "B" at -368.675,56.892 h7.62
  text "B" at 416.032,56.892 h7.62
  text "ASSEMBLY TOP" at 3.904,-27.345 h3.81
  text "A" at 415.778,-68.863 h7.62
  text "A" at -368.929,-68.99 h7.62
  text "APPROVALS" at 207.912,-72.37 h2.03
  text "DATE" at 250.972,-72.37 h2.03
  text "UNLESS OTHERWISE" at 151.964,-74.37 h2.54
  text "DESIGNER" at 191.22,-78.37 h2.03
  text "SPECIFIED" at 159.076,-79.37 h2.54
  text "DIMENSIONS ARE" at 153.996,-84.37 h2.54
  text "F. PRICE" at 195.22,-84.37 h2.54
  text "07/21/2016" at 245.06,-84.37 h2.54
  text "1511 Sixth Ave. Suite 300, Seattle, WA 98101 206.381.0898" at 282.308,-85.37 h2.54
  text "IN MILLIMETERS" at 153.996,-89.37 h2.54
  text "ENGINEER" at 191.22,-91.37 h2.03
  text "PRINTED CIRCUIT BOARD ASSEMBLY" at 295,-93.87 h3.81
  text "PROPRIETARY" at 103.456,-94.37 h3.81
  text "D. BRUEY" at 195.22,-97.37 h2.54
  text "TOLERANCES:" at 158.044,-99.37 h2.54
  text "AND" at 115.648,-100.37 h3.81
  text ".Board_Name" at 308.904,-102.145 h5.08
  text "MECH ENG" at 191.22,-104.37 h2.03
  text ".XX" at 156.724,-106.37 h2.29
  text "0.25" at 170.22,-106.37 h2.29
  text "CONFIDENTIAL" at 101.932,-106.87 h3.81
  text "SIZE" at 274.372,-108.37 h1.78
  text "DWG NO" at 285.22,-108.37 h1.78
  text "REV" at 393.084,-108.37 h1.78
  text "A. DAHLGREN" at 195.22,-110.37 h2.54
  text "THE INFORMATION CONTAINED IN" at 103.946,-111.12 h1.52
  text ".XXX" at 154.892,-113.37 h2.29
  text "0.127" at 170.22,-113.37 h2.29
  text "THIS DRAWING IS PROPRIETARY AND" at 102.122,-113.87 h1.52
  text "RESTRICTED. ANY REPRODUCTION" at 103.946,-116.62 h1.52
  text "600-" at 300.975,-118.071 h7.62
  text ".Board_Number" at 330.675,-118.171 h7.62
  text "D" at 274.172,-118.37 h7.62
  text ".PCB_Revision" at 388.616,-118.878 h7.62
  text "IN PART OR WHOLE WITHOUT THE" at 103.946,-119.37 h1.52
  text "ANGLES" at 157.228,-120.37 h2.29
  text "5" at 176.22,-120.37 h2.29
  text "EXPRESS WRITTEN PERMISSION" at 104.912,-122.12 h1.52
  text "OF THE OWNER IS PROHIBITED" at 104.912,-124.87 h1.52
  text "SCALE:4:1" at 275.812,-125.37 h1.78
  text "SHEET 1 OF 2" at 386.676,-125.37 h1.78
  text "1" at 354.26,-137.418 h7.62
  text "6" at -197.2,-137.57 h7.62
  text "5" at -86.761,-137.57 h7.62
  text "4" at 22.688,-137.849 h7.62
  text "3" at 133.508,-137.875 h7.62
  text "2" at 243.947,-137.875 h7.62
  text "7" at -307.309,-138.434 h7.62
ASY_DWG_R:
  lines w0.3: -359.78,-121.37 -218.78,-121.37 ; -359.78,-87.37 -218.78,-87.37 ; -358.78,-105.37 -218.78,-105.37 ; -327.78,-121.37 -327.78,-105.37 ; -231.78,-121.37 -231.78,-105.37 ; -218.78,-127.37 -218.78,-67.37
  lines w0.508: -139.802,373.834 -139.802,386.788 ; -139.802,373.834 -139.802,386.788 ; -139.802,373.834 -139.802,386.788 ; -379.324,-2.721 -360.02,-2.721 -379.324,-2.721 ; -379.324,-2.264 -360.02,-2.264 -379.324,-2.264 ; -379.324,122.704 -360.02,122.704 -379.324,122.704 ; -379.324,123.161 -360.02,123.161 -379.324,123.161 ; -379.324,248.129 -360.02,248.129 -379.324,248.129 ; -379.324,248.586 -360.02,248.586 -379.324,248.586 ; -250.038,-140.821 -250.038,-127.867 -250.038,-140.821 ; -250.013,373.834 -250.013,386.788 -250.013,373.834 ; -249.581,-140.821 -249.581,-127.867 -249.581,-140.821 ; -249.556,374.088 -249.556,386.788 -249.556,374.088 ; -139.345,373.834 -139.345,386.788 -139.345,373.834 ; -29.592,373.834 -29.592,386.788 -29.592,373.834 ; -29.135,373.834 -29.135,386.788 -29.135,373.834 ; 80.67,-140.821 80.67,-127.867 80.67,-140.821 ; 80.67,373.834 80.67,386.788 80.67,373.834 ; 81.127,-140.821 81.127,-127.867 81.127,-140.821 ; 81.127,373.834 81.127,386.788 81.127,373.834 ; 190.906,-140.821 190.906,-127.867 190.906,-140.821 ; 190.906,373.834 190.906,386.788 190.906,373.834 ; 191.363,-140.821 191.363,-127.867 191.363,-140.821 ; 191.363,373.834 191.363,386.788 191.363,373.834 ; 301.116,-140.821 301.116,-127.867 301.116,-140.821 ; 301.116,373.834 301.116,386.788 301.116,373.834 ; 301.573,-140.821 301.573,-127.867 301.573,-140.821 ; 301.573,373.834 301.573,386.788 301.573,373.834 ; 411.505,-2.721 430.809,-2.721 411.505,-2.721 ; 411.505,-2.264 430.809,-2.264 411.505,-2.264 ; 411.505,122.678 430.809,122.678 411.505,122.678 ; 411.505,123.136 430.809,123.136 411.505,123.136 ; 411.505,248.078 430.809,248.078 411.505,248.078 ; 411.505,248.535 430.809,248.535 411.505,248.535
  lines w1: -359.78,-127.37 411.22,-127.37 411.22,373.63 -359.78,373.63 -359.78,-127.37
  lines w1.1: -138.78,-140.37 -138.78,-127.37 ; -29.78,-140.37 -29.78,-127.37
  text "1" at -302.616,377.618 h7.62
  text "6" at 248.716,377.44 h7.62
  text "5" at 138.124,377.364 h7.62
  text "7" at 358.647,377.313 h7.62
  text "2" at -192.279,377.212 h7.62
  text "3" at -82.246,377.212 h7.62
  text "4" at 28.523,377.212 h7.62
  text "NOTES: UNLESS OTHERWISE SPECIFIED" at 399.095,361.53 h2.03
  text "1   RoHS COMPLIANT ASSEMBLY REQUIRED. ASSEMBLE PER IPC-A-610, CLASS 2," at 398.995,355.03 h2.03
  text "2   AQUEOUS BASED CLEANING AFTER SOLDER FOR ALL COMPONENTS IS PREFERRED, NO-CLEAN" at 398.901,349.825 h2.03
  text "RoHS SOLDER PROCESS IS ACCEPTABLE." at 399.045,345.68 h2.03
  text "3   ITEM IDENTIFICATION: MARK REVISION NUMBER OF THIS DRAWING IN THE SPACE PROVIDED." at 399.22,339.88 h2.03
  text "D" at -364.465,307.946 h7.62
  text "D" at 420.217,307.794 h7.62
  text "C" at -364.465,182.495 h7.62
  text "C" at 420.344,182.292 h7.62
  text "B" at -364.592,56.892 h7.62
  text "B" at 420.115,56.892 h7.62
  text "ASSEMBLY BOTTOM" at 48.904,-27.345 h3.81
  text "A" at -364.338,-68.863 h7.62
  text "A" at 420.369,-68.99 h7.62
  text "1511 Sixth Ave. Suite 300, Seattle, WA 98101 206.381.0898" at -230.868,-85.37 h2.54
  text "PRINTED CIRCUIT BOARD ASSEMBLY" at -243.56,-93.87 h3.81
  text ".Board_Name" at -257.464,-102.145 h5.08
  text "REV" at -341.644,-108.37 h1.78
  text "DWG NO" at -233.78,-108.37 h1.78
  text "SIZE" at -222.932,-108.37 h1.78
  text "600-" at -249.535,-118.071 h7.62
  text ".Board_Number" at -279.235,-118.171 h7.62
  text "D" at -222.732,-118.37 h7.62
  text ".PCB_Revision" at -338.069,-118.892 h7.62
  text "SHEET 2 OF 2" at -335.236,-125.37 h1.78
  text "SCALE:4:1" at -224.372,-125.37 h1.78
  text "1" at -302.82,-137.418 h7.62
  text "5" at 138.201,-137.57 h7.62
  text "6" at 248.64,-137.57 h7.62
  text "4" at 28.752,-137.849 h7.62
  text "2" at -192.507,-137.875 h7.62
  text "3" at -82.068,-137.875 h7.62
  text "7" at 358.749,-138.434 h7.62
TITLEBLOCK:
  lines w0.25: -37.68,-65.87 83.32,-65.87 ; 20.82,-46.87 83.32,-46.87 83.32,-75.37 -37.68,-75.37 -37.68,-53.37 83.32,-53.37 ; 38.82,-75.37 38.82,-46.87 ; 38.82,-58.37 83.32,-58.37 ; 72.32,-65.87 72.32,-58.37
  text "PRODUCT" at 25.064,-49.37 h1.52
  text "1511 SIXTH AVENUE, THIRD FLOOR" at 39.82,-49.37 h1.52
  text "DEVELOPMENT" at 23.132,-52.37 h1.52
  text "SEATTLE,WA 98101  206.381.0898" at 39.82,-52.37 h1.52
  text "DATE" at 39.82,-55.37 h1.02
  text "07/21/2016" at 52.7,-56.87 h2.03
  text "PRINTED CIRCUIT BOARD" at -18.916,-57.87 h2.29
  text "PART NUMBER" at 39.82,-60.37 h1.02
  text "REV" at 76.596,-60.37 h1.02
  text ".Board_Name" at -24.65,-64 h3.81
  text "601-" at 45.475,-64.071 h2.54
  text ".Board_Number" at 55.775,-64.071 h2.54
  text ".PCB_Revision" at 75.62,-64.538 h2.54
  text "PROPRIETARY AND CONFIDENTIAL" at 44.046,-68.87 h1.52
  text "THE INFORMATION CONTAINED IN THIS DRAWING IS PROPRIETARY AND" at 42.83,-70.87 h0.76
  text "RESTRICTED. ANY REPRODUCTION IN PART OR WHOLE WITHOUT THE" at 43.742,-72.37 h0.76
  text "EXPRESS WRITTEN PERMISSION OF THE OWNER IS PROHIBITED" at 44.458,-73.87 h0.76
DXF_TOP:
  drawing of 205 lines, arcs and shapes, not listed
  text "BOARD OUTLINE" at -62.06,160.873 h3.17
  text "KEEP WITHIN/KEEP OUT" at 33.064,160.873 h3.17
  text "COMPONENT PLACEMENT" at 136.36,160.873 h3.17
  text "PRIMARY" at -125.046,116.545 h3.17
DXF_BOT:
  circle w0.013: c-25.493,56.834 r1.075
  circle w0.013: c-25.493,52.709 r0.6
  circle w0.013: c-71.193,52.709 r0.6
  circle w0.013: c-71.193,56.834 r1.075
  circle w0.013: c32.429,61.143 r1.075
  circle w0.013: c78.129,61.143 r1.075
  circle w0.013: c32.429,61.143 r2.25
  circle w0.013: c78.129,57.018 r0.6
  circle w0.013: c32.429,57.018 r0.6
  circle w0.013: c78.129,61.143 r2.25
  circle w0.013: c154.385,62.135 r1.25
  circle w0.013: c183.235,62.135 r1.075
  circle w0.013: c183.235,58.01 r0.6
  circle w0.013: c137.535,58.01 r0.6
  circle w0.013: c137.535,62.135 r1.075
  circle w0.013: c45.7,0 r1.075
  circle w0.013: c45.7,4.125 r0.6
  circle w0.013: c0,4.125 r0.6
  circle w0.013: c0,0 r1.075
  circle w0.013: c28.85,0 r1.25
  lines w0.013: 29.279,51.143 29.279,48.143 ccw(c30.279,48.143) 30.279,47.143 58.279,47.143 ccw(c58.279,48.143) 59.279,48.143 59.279,50.143 cw(c60.279,50.143) 60.279,51.143 ; 29.279,51.143 29.279,71.143 ; 29.279,51.143 60.279,51.143 ; 29.279,71.143 29.279,74.143 cw(c30.279,74.143) 30.279,75.143 58.279,75.143 cw(c58.279,74.143) 59.279,74.143 59.279,72.143 ccw(c60.279,72.143) 60.279,71.143 ; 29.279,71.143 60.279,71.143 ; 60.279,51.143 78.379,51.143 ccw(c78.379,52.143) 79.379,52.143 79.379,52.893 cw(c83.079,52.893) 84.74,56.2 ccw(c85.189,57.093) 85.189,56.093 91.279,56.093 ccw(c91.279,56.593) 91.779,56.593 91.779,65.693 ccw(c91.279,65.693) 91.279,66.193 85.189,66.193 ccw(c85.189,65.193) 84.74,66.087 cw(c83.079,69.393) 79.379,69.393 79.379,70.143 ccw(c78.379,70.143) 78.379,71.143 60.279,71.143 ; -74.343,43.834 ccw(c-73.343,43.834) -73.343,42.834 -45.343,42.834 ccw(c-45.343,43.834) -44.343,43.834 -44.343,45.834 cw(c-43.343,45.834) -43.343,46.834 -25.243,46.834 ccw(c-25.243,47.834) -24.243,47.834 -24.243,48.584 cw(c-20.543,48.584) -18.882,51.89 ccw(c-18.433,52.784) -18.433,51.784 -12.343,51.784 ccw(c-12.343,52.284) -11.843,52.284 -11.843,61.384 ccw(c-12.343,61.384) -12.343,61.884 -18.433,61.884 ccw(c-18.433,60.884) -18.882,61.778 cw(c-20.543,65.084) -24.243,65.084 -24.243,65.834 ccw(c-25.243,65.834) -25.243,66.834 -43.343,66.834 cw(c-43.343,67.834) -44.343,67.834 -44.343,69.834 ccw(c-45.343,69.834) -45.343,70.834 -73.343,70.834 ccw(c-73.343,69.834) -74.343,69.834 -74.343,43.834 ; -13.65,-4.55 ccw(c-13.15,-4.55) -13.15,-5.05 -7.06,-5.05 ccw(c-7.06,-4.05) -6.611,-4.944 cw(c-4.95,-8.25) -1.25,-8.25 -1.25,-9 ccw(c-0.25,-9) -0.25,-10 17.85,-10 cw(c17.85,-11) 18.85,-11 18.85,-13 ccw(c19.85,-13) 19.85,-14 47.85,-14 ccw(c47.85,-13) 48.85,-13 48.85,13 ccw(c47.85,13) 47.85,14 19.85,14 ccw(c19.85,13) 18.85,13 18.85,11 cw(c17.85,11) 17.85,10 -0.25,10 ccw(c-0.25,9) -1.25,9 -1.25,8.25 cw(c-4.95,8.25) -6.611,4.944 ccw(c-7.06,4.05) -7.06,5.05 -13.15,5.05 ccw(c-13.15,4.55) -13.65,4.55 -13.65,-4.55 ; 26.6,-2.25 26.6,2.25 31.1,2.25 31.1,-2.25 26.6,-2.25 ; 134.385,49.135 ccw(c135.385,49.135) 135.385,48.135 163.385,48.135 ccw(c163.385,49.135) 164.385,49.135 164.385,51.135 cw(c165.385,51.135) 165.385,52.135 183.485,52.135 ccw(c183.485,53.135) 184.485,53.135 184.485,53.885 cw(c188.185,53.885) 189.846,57.191 ccw(c190.295,58.085) 190.295,57.085 196.385,57.085 ccw(c196.385,57.585) 196.885,57.585 196.885,66.685 ccw(c196.385,66.685) 196.385,67.185 190.295,67.185 ccw(c190.295,66.185) 189.846,67.079 cw(c188.185,70.385) 184.485,70.385 184.485,71.135 ccw(c183.485,71.135) 183.485,72.135 165.385,72.135 cw(c165.385,73.135) 164.385,73.135 164.385,75.135 ccw(c163.385,75.135) 163.385,76.135 135.385,76.135 ccw(c135.385,75.135) 134.385,75.135 134.385,49.135 ; 152.135,59.885 156.635,59.885 156.635,64.385 152.135,64.385 152.135,59.885
  text "SECONDARY" at -125.28,54.713 h3.17
DXF_JULY21_TOP:
  drawing of 175 lines, arcs and shapes, not listed
  text "BOARD OUTLINE" at 5.94,273.873 h3.17
  text "KEEP WITHIN/KEEP OUT" at 101.064,273.873 h3.17
  text "COMPONENT PLACEMENT" at 204.36,273.873 h3.17
  text "PRIMARY" at -57.046,229.545 h3.17
DXF_JULY21_BOT:
  circle w0.013: c28.85,0 r1.25
  circle w0.013: c0,0 r1.075
  circle w0.013: c0,4.125 r0.6
  circle w0.013: c45.7,4.125 r0.6
  circle w0.013: c45.7,0 r1.075
  circle w0.013: c204.935,175.135 r1.075
  circle w0.013: c204.935,171.01 r0.6
  circle w0.013: c250.635,171.01 r0.6
  circle w0.013: c250.635,175.135 r1.075
  circle w0.013: c221.785,175.135 r1.25
  circle w0.013: c145.529,174.143 r2.25
  circle w0.013: c99.829,170.018 r0.6
  circle w0.013: c145.529,170.018 r0.6
  circle w0.013: c99.829,174.143 r2.25
  circle w0.013: c145.529,174.143 r1.075
  circle w0.013: c99.829,174.143 r1.075
  circle w0.013: c-3.793,169.834 r1.075
  circle w0.013: c-3.793,165.709 r0.6
  circle w0.013: c41.907,165.709 r0.6
  circle w0.013: c41.907,169.834 r1.075
  lines w0.013: 96.679,164.143 127.679,164.143 ; 96.679,164.143 96.679,184.143 ; 96.679,164.143 96.679,161.143 ccw(c97.679,161.143) 97.679,160.143 125.679,160.143 ccw(c125.679,161.143) 126.679,161.143 126.679,163.143 cw(c127.679,163.143) 127.679,164.143 ; 96.679,184.143 127.679,184.143 ; 96.679,184.143 96.679,187.143 cw(c97.679,187.143) 97.679,188.143 125.679,188.143 cw(c125.679,187.143) 126.679,187.143 126.679,185.143 ccw(c127.679,185.143) 127.679,184.143 ; 127.679,164.143 145.779,164.143 ccw(c145.779,165.143) 146.779,165.143 146.779,165.893 cw(c150.479,165.893) 152.14,169.2 ccw(c152.589,170.093) 152.589,169.093 158.679,169.093 ccw(c158.679,169.593) 159.179,169.593 159.179,178.693 ccw(c158.679,178.693) 158.679,179.193 152.589,179.193 ccw(c152.589,178.193) 152.14,179.087 cw(c150.479,182.393) 146.779,182.393 146.779,183.143 ccw(c145.779,183.143) 145.779,184.143 127.679,184.143 ; -13.65,-4.55 ccw(c-13.15,-4.55) -13.15,-5.05 -7.06,-5.05 ccw(c-7.06,-4.05) -6.611,-4.944 cw(c-4.95,-8.25) -1.25,-8.25 -1.25,-9 ccw(c-0.25,-9) -0.25,-10 17.85,-10 cw(c17.85,-11) 18.85,-11 18.85,-13 ccw(c19.85,-13) 19.85,-14 47.85,-14 ccw(c47.85,-13) 48.85,-13 48.85,13 ccw(c47.85,13) 47.85,14 19.85,14 ccw(c19.85,13) 18.85,13 18.85,11 cw(c17.85,11) 17.85,10 -0.25,10 ccw(c-0.25,9) -1.25,9 -1.25,8.25 cw(c-4.95,8.25) -6.611,4.944 ccw(c-7.06,4.05) -7.06,5.05 -13.15,5.05 ccw(c-13.15,4.55) -13.65,4.55 -13.65,-4.55 ; -6.943,156.834 ccw(c-5.943,156.834) -5.943,155.834 22.057,155.834 ccw(c22.057,156.834) 23.057,156.834 23.057,158.834 cw(c24.057,158.834) 24.057,159.834 42.157,159.834 ccw(c42.157,160.834) 43.157,160.834 43.157,161.584 cw(c46.857,161.584) 48.518,164.89 ccw(c48.966,165.784) 48.966,164.784 55.057,164.784 ccw(c55.057,165.284) 55.557,165.284 55.557,174.384 ccw(c55.057,174.384) 55.057,174.884 48.966,174.884 ccw(c48.966,173.884) 48.518,174.778 cw(c46.857,178.084) 43.157,178.084 43.157,178.834 ccw(c42.157,178.834) 42.157,179.834 24.057,179.834 cw(c24.057,180.834) 23.057,180.834 23.057,182.834 ccw(c22.057,182.834) 22.057,183.834 -5.943,183.834 ccw(c-5.943,182.834) -6.943,182.834 -6.943,156.834 ; 26.6,-2.25 31.1,-2.25 31.1,2.25 26.6,2.25 26.6,-2.25 ; 201.785,162.135 ccw(c202.785,162.135) 202.785,161.135 230.785,161.135 ccw(c230.785,162.135) 231.785,162.135 231.785,164.135 cw(c232.785,164.135) 232.785,165.135 250.885,165.135 ccw(c250.885,166.135) 251.885,166.135 251.885,166.885 cw(c255.585,166.885) 257.246,170.191 ccw(c257.695,171.085) 257.695,170.085 263.785,170.085 ccw(c263.785,170.585) 264.285,170.585 264.285,179.685 ccw(c263.785,179.685) 263.785,180.185 257.695,180.185 ccw(c257.695,179.185) 257.246,180.079 cw(c255.585,183.385) 251.885,183.385 251.885,184.135 ccw(c250.885,184.135) 250.885,185.135 232.785,185.135 cw(c232.785,186.135) 231.785,186.135 231.785,188.135 ccw(c230.785,188.135) 230.785,189.135 202.785,189.135 ccw(c202.785,188.135) 201.785,188.135 201.785,162.135 ; 219.535,172.885 219.535,177.385 224.035,177.385 224.035,172.885 219.535,172.885
  text "SECONDARY" at -57.28,167.713 h3.17
Drill Drawing:
  circle w0.254: c111.787,-10.007 r0.847
  lines w0.254: 110.94,-18.473 112.633,-18.473 112.633,-16.78 110.94,-16.78 110.94,-18.473 ; 110.94,-14.24 111.363,-14.24 111.787,-14.663 112.21,-14.24 112.633,-14.24 112.21,-13.817 112.633,-13.393 112.21,-13.393 111.787,-12.97 111.363,-13.393 110.94,-13.393 111.363,-13.817 110.94,-14.24
  lines w0.381: 109.421,-19.616 315.715,-19.616 ; 109.421,-8.186 315.715,-8.186 ; 123.414,-23.426 123.414,-4.376 ; 136.872,-23.426 136.872,-4.376 ; 164.55,-23.426 164.55,-4.376 ; 177.399,-23.426 177.399,-4.376 ; 196.038,-23.426 196.038,-4.376 ; 234.127,-23.426 234.127,-4.376 ; 249.109,-23.426 249.109,-4.376 ; 268.052,-23.426 268.052,-4.376 ; 287.097,-23.426 287.097,-4.376 ; 109.421,-23.426 315.715,-23.426 315.715,-4.376 109.421,-4.376 109.421,-23.426
  text "Symbol" at 111.707,-7.043 h1.83
  text "Count" at 124.557,-7.043 h1.83
  text "Hole Size" at 138.015,-7.043 h1.83
  text "Plated" at 165.693,-7.043 h1.83
  text "Hole Type" at 178.542,-7.043 h1.83
  text "Drill Layer Pair" at 197.181,-7.043 h1.83
  text "Via/Pad" at 235.27,-7.043 h1.83
  text "Pad Shape" at 250.252,-7.043 h1.83
  text "Template" at 269.195,-7.043 h1.83
  text "Hole Tolerance" at 288.24,-7.043 h1.83
  text "13" at 124.557,-10.853 h1.52
  text "0.250mm (9.84mil)" at 138.015,-10.853 h1.52
  text "PTH" at 165.693,-10.853 h1.52
  text "Round" at 178.542,-10.853 h1.52
  text "Top Layer - Bottom Layer" at 197.181,-10.853 h1.52
  text "Via" at 235.27,-10.853 h1.52
  text "Rounded" at 250.252,-10.853 h1.52
  text "v50h25m0mx0" at 269.195,-10.853 h1.52
  text "2" at 124.557,-14.663 h1.52
  text "1.200mm (47.24mil)" at 138.015,-14.663 h1.52
  text "NPTH" at 165.693,-14.663 h1.52
  text "Round" at 178.542,-14.663 h1.52
  text "Top Layer - Bottom Layer" at 197.181,-14.663 h1.52
  text "Pad" at 235.27,-14.663 h1.52
  text "Rounded" at 250.252,-14.663 h1.52
  text "c120hn120" at 269.195,-14.663 h1.52
  text "2" at 124.557,-18.473 h1.52
  text "2.150mm (84.65mil)" at 138.015,-18.473 h1.52
  text "PTH" at 165.693,-18.473 h1.52
  text "Round" at 178.542,-18.473 h1.52
  text "Top Layer - Bottom Layer" at 197.181,-18.473 h1.52
  text "Pad" at 235.27,-18.473 h1.52
  text "Rounded" at 250.252,-18.473 h1.52
  text "c425h215" at 269.195,-18.473 h1.52
  text "17 Total" at 124.557,-22.283 h1.52
  text ".Layer_Name" at 9.431,-27.042 h3.81
DXF_TOP (Mech19):
  drawing of 154 lines, arcs and shapes, not listed

## Text inside footprints (layer, text, board x,y; h text height)
M1: Mechanical 18 "1" at 43.929,0.011 h0.64
M2: Mechanical 18 "1" at -1.778,0 h0.64